# EAGLE board Placa de processamento (EAGLE 9.6.2)
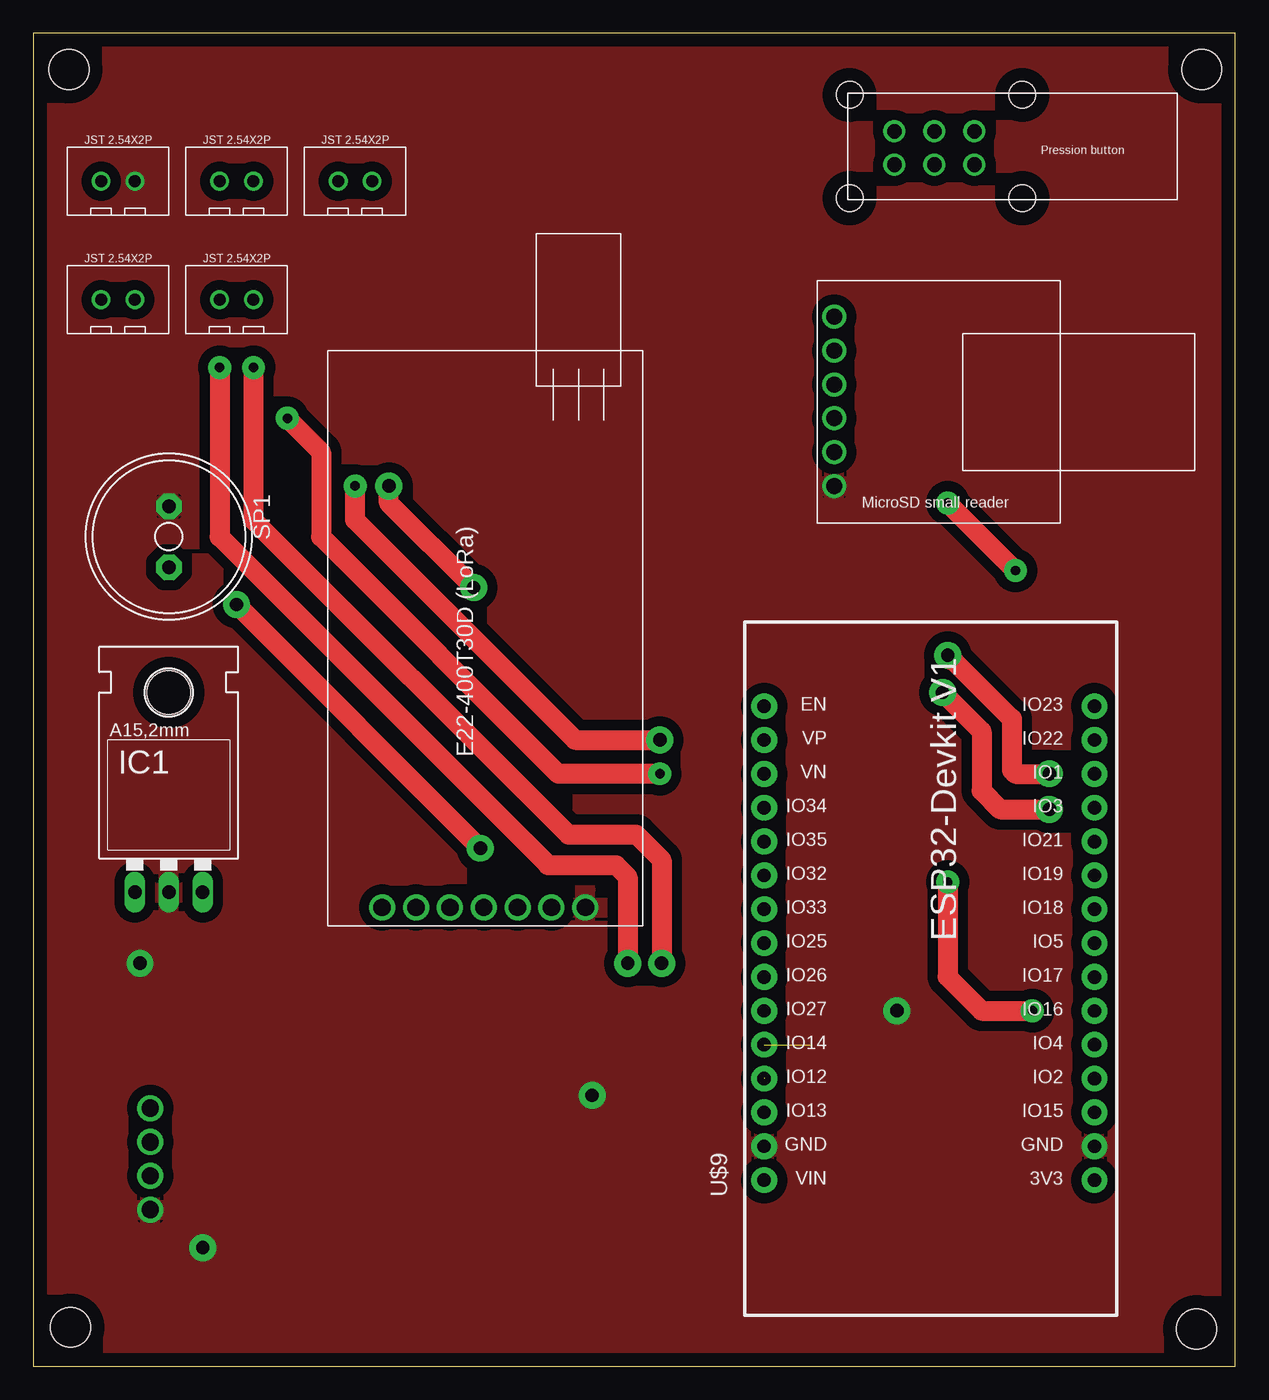
[diagram p0: board, top side]
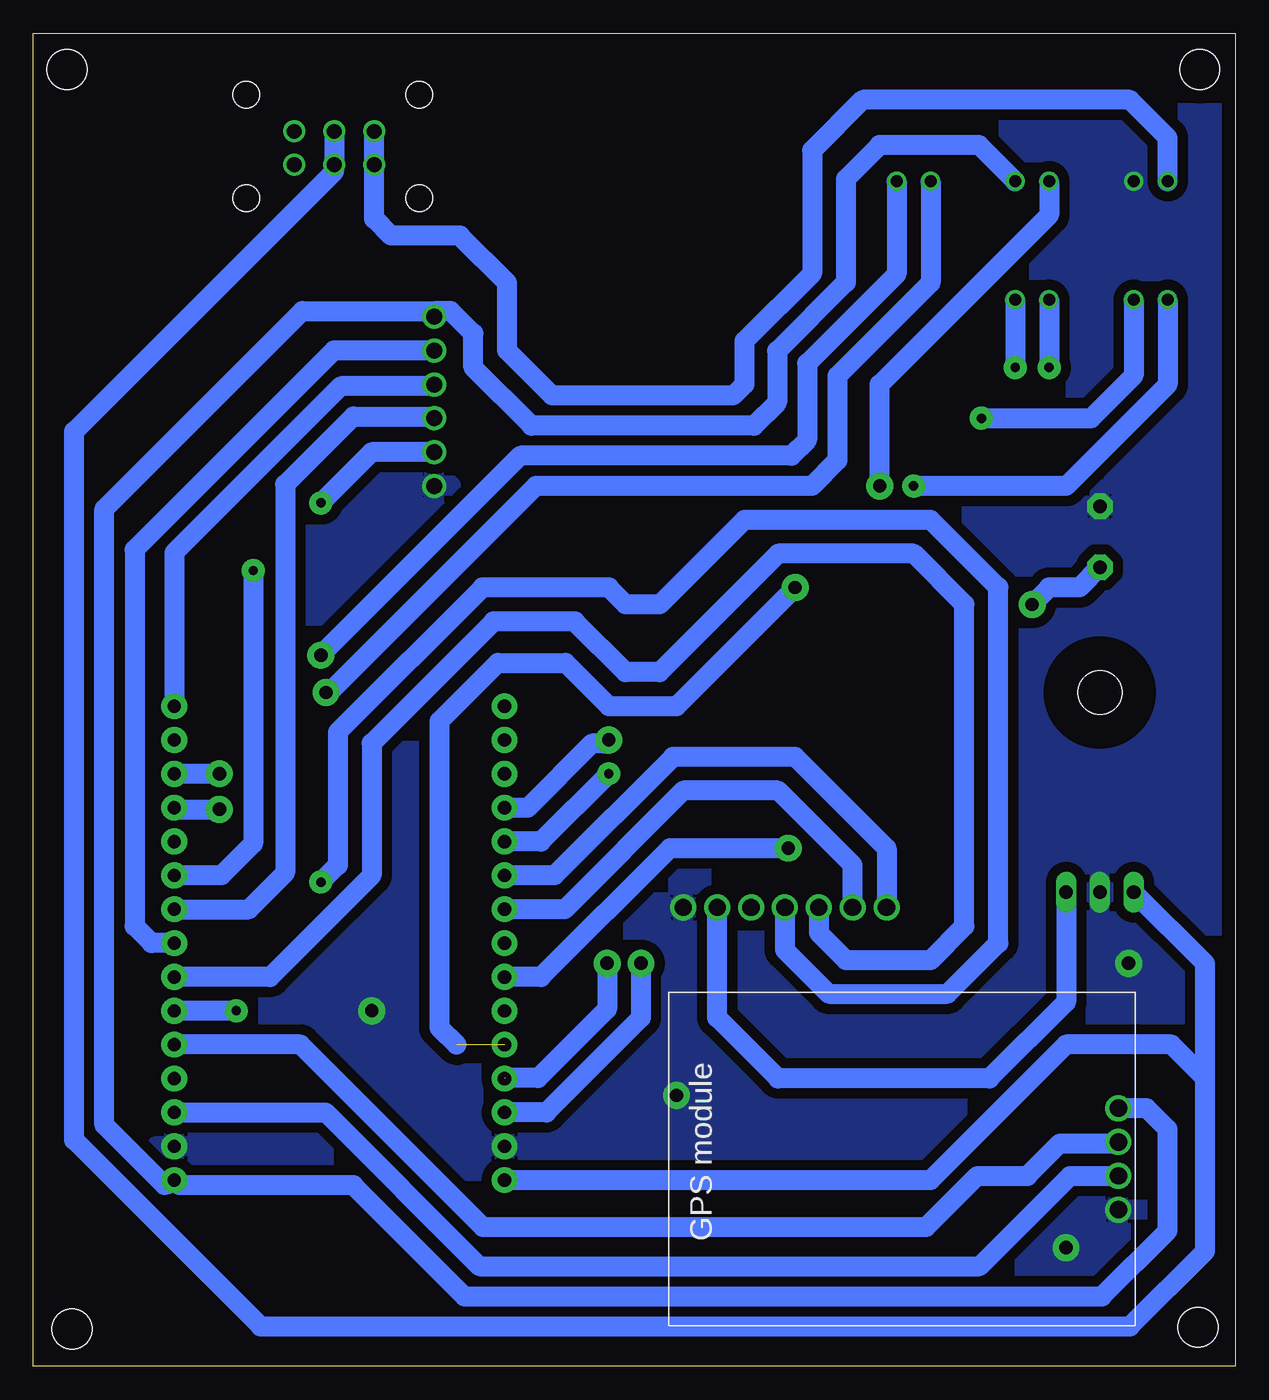
[diagram p1: board, bottom side, seen from below]

Size 90.15 x 100 mm. Coordinates in mm from the lower left corner, seen from the top.
Outline: 0,0 90.15,0 90.15,100 0,100 0,0
Copper layers (1*16): Top 0.035mm / dielectric 1.5mm / Bottom 0.035mm
Design rules "default *": minimum track width 1.5mm, minimum drill 0.35mm, track to track 30mil, track to pad 0.7mm, pad to pad 6mil, via to via 6mil, smd to smd 6mil, copper to edge 40mil, drill to drill 6mil, minimum pad ring 10mil, minimum via ring 20mil, stop-mask expansion 4mil, vias tented up to drill 0mil, thermal gap 10mil
Holes 3 mm at 2.79,2.92 87.25,2.79 2.67,97.28 87.63,97.28

## Footprints (pad centres in the part's own frame; a part is rotated, then mirrored left to right if it is on the bottom)
78XXL = drill 1.016 long: GND 0,-3.81; IN -2.54,-3.81; OUT 2.54,-3.81 | hole 3.302: 0,11.176
AL11P = drill 1.016 pad 1.905 octagon: + 2.286,0; - -2.286,0
PRESSION_BUTTON_FOOTPRINT = drill 1.1: PL1 -7.803,-1.302; PL2 -4.803,-1.302; PL3 -1.803,-1.302; PR1 -7.803,1.198; PR2 -4.803,1.198; PR3 -1.803,1.198 | hole 2: -11.176,3.937; -11.176,-3.81; 1.778,-3.81; 1.778,3.937
MICROSD_SMALL_READER_FOOTPRINT = drill 1.2: 3V3 -7.239,6.35; CLK -7.239,-1.27; CS -7.239,3.81; GND -7.239,-6.35; MISO -7.239,-3.81; MOSI -7.239,1.27
JST2.54X2P_FOOTPRINT = drill 0.9: 1 -1.27,0; 2 1.27,0
GPS_MODULE_FOOTPRINT = drill 1.3: GND -4.01,-16.51; RX 1.07,-16.51; TX -1.47,-16.51; VCC 3.61,-16.51
E22-400T30D_FOOTPRINT = drill 1.3: AUX -16.383,-0.762; GND -16.383,-5.842; M0 -16.383,9.398; M1 -16.383,6.858; RXD -16.383,4.318; TXD -16.383,1.778; VCC -16.383,-3.302
ESP32-DEVKITV1 = drill 1 pad 1.93: 1 -22.87,-13.54; 2 -20.33,-13.54; 3 -17.79,-13.54; 4 -15.25,-13.54; 5 -12.71,-13.54; 6 -10.17,-13.54; 7 -7.63,-13.54; 8 -5.09,-13.54; 9 -2.55,-13.54; 10 -0.01,-13.54; 11 2.53,-13.54; 12 5.07,-13.54; 13 7.61,-13.54; 14 10.15,-13.54; 15 12.69,-13.54; 16 12.69,11.23; 17 10.15,11.23; 18 7.61,11.23; 19 5.07,11.23; 20 2.53,11.23; 21 -0.01,11.23; 22 -2.55,11.23; 23 -5.09,11.23; 24 -7.63,11.23; 25 -10.17,11.23; 26 -12.71,11.23; 27 -15.25,11.23; 28 -17.79,11.23; 29 -20.33,11.23; 30 -22.87,11.23

## Placement (x,y rotation side)
IC1  [78XXL]  10.16,39.37 0 top
SP1  AL11P  [AL11P]  10.16,62.23 270 top
U$1  PRESSION_BUTTON  [PRESSION_BUTTON_FOOTPRINT]  72.39,91.44 0 top
U$2  MICROSD_SMALL_READER  [MICROSD_SMALL_READER_FOOTPRINT]  67.31,72.39 0 top
U$3  JST2.54X2P  [JST2.54X2P_FOOTPRINT]  6.35,88.9 0 top
U$4  JST2.54X2P  [JST2.54X2P_FOOTPRINT]  15.24,80.01 0 top
U$5  JST2.54X2P  [JST2.54X2P_FOOTPRINT]  15.24,88.9 0 top
U$6  JST2.54X2P  [JST2.54X2P_FOOTPRINT]  6.35,80.01 0 top
U$7  GPS_MODULE  [GPS_MODULE_FOOTPRINT]  25.27,15.75 90 bottom
U$8  E22-400T30D  [E22-400T30D_FOOTPRINT]  35.56,50.8 90 top
U$9  ESP32DEVKITV1  [ESP32-DEVKITV1]  66.04,36.83 90 top
U$10  JST2.54X2P  [JST2.54X2P_FOOTPRINT]  24.13,88.9 0 top

## Library data of the parts
IC1 = v-reg
SP1 = buzzer; OC_FARNELL: unknown; OC_NEWARK: unknown
U$1-U$8 U$10 = CRD
U$9 = ESP32-DEVKITV1

## Nets
3V3: U$2.3V3 U$5.2 U$7.VCC U$9.1
5V: IC1.OUT U$8.VCC
BUZZER: SP1.+ U$9.24
CS: U$2.CS U$9.8
GND: IC1.GND SP1.- U$2.GND U$3.2 U$7.GND U$8.GND U$9.2 U$9.29
M0: U$8.M0 U$9.21
M1: U$8.M1 U$9.22
MISO: U$2.MISO U$9.10
MOSI: U$2.MOSI U$9.15
N$3: U$8.AUX
OPTOACOPLADOR1: U$6.1 U$9.19
OPTOACOPLADOR2: U$6.2 U$9.20
RX0: U$9.12 U$10.1
RX1: U$7.TX U$9.3
RX2: U$8.TXD U$9.6
SCLK: U$2.CLK U$9.9
SIGNAL1: U$5.1 U$9.26
SKIB1: U$4.1 U$9.28
SKIB2: U$4.2 U$9.27
TX0: U$9.13 U$10.2
TX1: U$7.RX U$9.5
TX2: U$8.RXD U$9.7
V_BATTERY: U$1.PL1 U$1.PR1 U$3.1
VIN: IC1.IN U$1.PL2 U$1.PR2 U$9.30

## Tracks (layer width: path | path; a pad name or v marks a point on that pad's centre or on a via)
3V3
  Bottom 1.5: 59.94,79.17 69.96,79.17 84.83,64.31 84.83,18.1 80.3,13.57 U$9.1 79.17,13.57 66.15,13.57 57.82,5.24 10,5.24 5.08,10.16 5.08,17.78 6.66,19.36 U$7.VCC | 59.94,79.17 U$2.3V3 | U$5.2 19.22,91.61 26.67,91.61 29.21,89.07 29.21,81.33 34.37,76.17 34.37,72.31 36.12,70.56 52.78,70.56 57.15,74.93 57.15,77.47 58.85,79.17 59.94,79.17
5V
  Bottom 1.5: IC1.OUT 12.7,27.33 18.44,21.59 34.29,21.59 38.86,26.16 U$8.VCC
BUZZER  (via drill 1 pad 1.3)
  Top 1.5: v15.24,57.15 v33.53,38.86
  Bottom 1.5: SP1.+ 11.68,58.42 13.97,58.42 v15.24,57.15 | U$9.24 52.08,29.2 42.42,38.86 v33.53,38.86
CS
  Bottom 1.5: U$9.8 81.28,31.74 81.28,31.75 82.55,33.02 82.55,61.26 67.61,76.2 U$2.CS
GND  (via drill 1 pad 1.3)
  other vias: 41.91,20.32 64.77,26.67 12.7,8.89 8,30.23
  pour Bottom: -1.27,99.06 -1.27,0 90.17,0 90.17,99.06
  pour Top: -1.27,99.06 -1.27,0 90.17,0 90.17,99.06
M0
  Bottom 1.5: U$8.M0 26.16,38.86 33.02,45.72 42.16,45.72 51.06,36.82 U$9.21
M1
  Bottom 1.5: U$8.M1 28.7,37.59 34.29,43.18 41.4,43.18 50.3,34.28 U$9.22
MISO  (via drill 0.7 pad 1.3)
  Top 1.5: v68.58,64.77 v73.66,59.69
  Bottom 1.5: U$2.MISO 64.77,68.58 v68.58,64.77 | U$9.10 76.05,36.82 73.66,39.21 v73.66,59.69
MOSI
  Bottom 1.5: U$2.MOSI 60.22,73.52 67.09,73.52 79.58,61.03 U$9.15
OPTOACOPLADOR1  (via drill 0.7 pad 1.3, 1 pad 1.3)
  Top 1.5: v24.13,66.04 24.13,63.5 40.64,46.99 v46.99,46.99
  Bottom 1.5: v24.13,66.04 12.7,66.04 5.08,73.66 U$6.1 | v46.99,46.99 47.27,46.71 48.26,46.71 53.07,41.9 U$9.19
OPTOACOPLADOR2  (via drill 0.7 pad 1.3)
  Top 1.5: v19.05,71.12 21.59,68.58 21.59,62.23 39.37,44.45 v46.99,44.45
  Bottom 1.5: U$6.2 7.62,74.32 10.82,71.12 v19.05,71.12 | v46.99,44.45 52.08,39.36 U$9.20
RX0  (via drill 1 pad 1.3)
  Top 1.5: v68.2,50.55 71.12,47.62 71.12,43.18 72.52,41.78 v76.2,41.78
  Bottom 1.5: U$10.1 22.86,81.28 29.84,74.3 29.84,67.94 31.75,66.04 52.45,66.04 67.94,50.55 v68.2,50.55 | U$9.12 79.46,41.78 v76.2,41.78
RX1
  Bottom 1.5: U$9.3 68.23,19.04 56.69,7.5 19.17,7.5 12.39,14.28 U$7.TX
RX2  (via drill 0.7 pad 1.3)
  Top 1.5: v68.58,36.32 68.58,29.21 71.12,26.67 v74.93,26.67
  Bottom 1.5: U$8.TXD 33.78,31.24 30.48,27.94 21.59,27.94 17.78,31.75 17.78,58.42 22.86,63.5 36.83,63.5 43.18,57.15 45.72,57.15 46.99,58.42 56.46,58.42 67.31,47.57 67.31,37.59 v68.58,36.32 | U$9.6 v74.93,26.67
SCLK
  Bottom 1.5: U$9.9 73.99,34.28 71.26,37.01 71.26,66.15 66.15,71.25 59.94,71.25 U$2.CLK
SIGNAL1  (via drill 1 pad 1.3)  (1 unrouted)
  Top 1.5: v33.02,58.42 26.67,64.77 v26.67,66.04
  Bottom 1.5: 58.41,24.12 59.69,25.4 59.69,48.39 55.31,52.77 50.23,52.77 46.99,49.53 41.91,49.53 v33.02,58.42 | U$5.1 13.97,86.36 26.67,73.66 v26.67,66.04
SKIB1  (via drill 0.7 pad 1.3, 1 pad 1.3)
  Top 1.5: v13.97,74.93 13.97,62.23 38.61,37.59 43.69,37.59 44.58,36.7 v44.58,30.23
  Bottom 1.5: U$4.1 v13.97,74.93 | U$9.28 51.68,19.04 44.58,26.14 v44.58,30.23
SKIB2  (via drill 0.7 pad 1.3, 1 pad 1.3)  (1 unrouted)
  Top 1.5: v16.51,74.93 16.51,63.5 40.13,39.88 45.21,39.88 47.12,37.97 v47.12,30.23
  Bottom 1.5: U$4.2 v16.51,74.93 | 54.81,21.63 52.29,21.63 47.12,26.8 v47.12,30.23
TX0  (via drill 1 pad 1.3)
  Top 1.5: v68.58,53.34 69.11,52.81 69.14,52.81 73.38,48.56 73.38,44.73 73.66,44.45 v76.2,44.45
  Bottom 1.5: U$10.2 25.4,81.94 32.11,75.23 32.11,69.49 33.3,68.3 53.62,68.3 v68.58,53.34 | v76.2,44.45 U$9.13
TX1
  Bottom 1.5: U$9.5 70.12,24.13 56.42,10.43 23.2,10.43 19.36,14.28 15.59,14.28 13.17,16.7 8.88,16.7 U$7.RX
TX2
  Bottom 1.5: U$8.RXD 31.24,32.51 29.21,30.48 22.86,30.48 20.32,33.02 20.32,57.15 24.13,60.96 34.29,60.96 43.18,52.07 45.72,52.07 49.53,55.88 55.63,55.88 64.77,46.74 64.77,36.83 72.4,29.2 U$9.7
V_BATTERY
  Bottom 1.5: U$3.1 5.08,92.17 7.92,95 27.94,95 31.75,91.19 31.75,81.99 36.83,76.91 36.83,73.66 37.66,72.83 51.24,72.83 54.61,76.2 54.61,81.28 58.16,84.83 63.34,84.83 64.59,86.08 U$1.PL1 U$1.PR1
VIN
  Bottom 1.5: 2.26,21.59 2.26,8.63 7.92,2.98 73.1,2.98 87.09,16.96 87.09,70.12 67.59,89.62 U$1.PL2 U$1.PR2 | 2.26,21.59 4.8,24.13 12.7,24.13 22.87,13.96 U$9.30 | IC1.IN 2.26,30.2 2.26,21.59